# Altium PCB pcb.PcbDoc
Units mm, origin at the board's own origin, x right, y up, seen from the top; angles counter-clockwise.
Board outline 26 x 23 mm, 2 copper layers (Top Layer, Bottom Layer), stack 1.58 mm thick; 25 components, 19 nets, 112 pads, 26 vias.
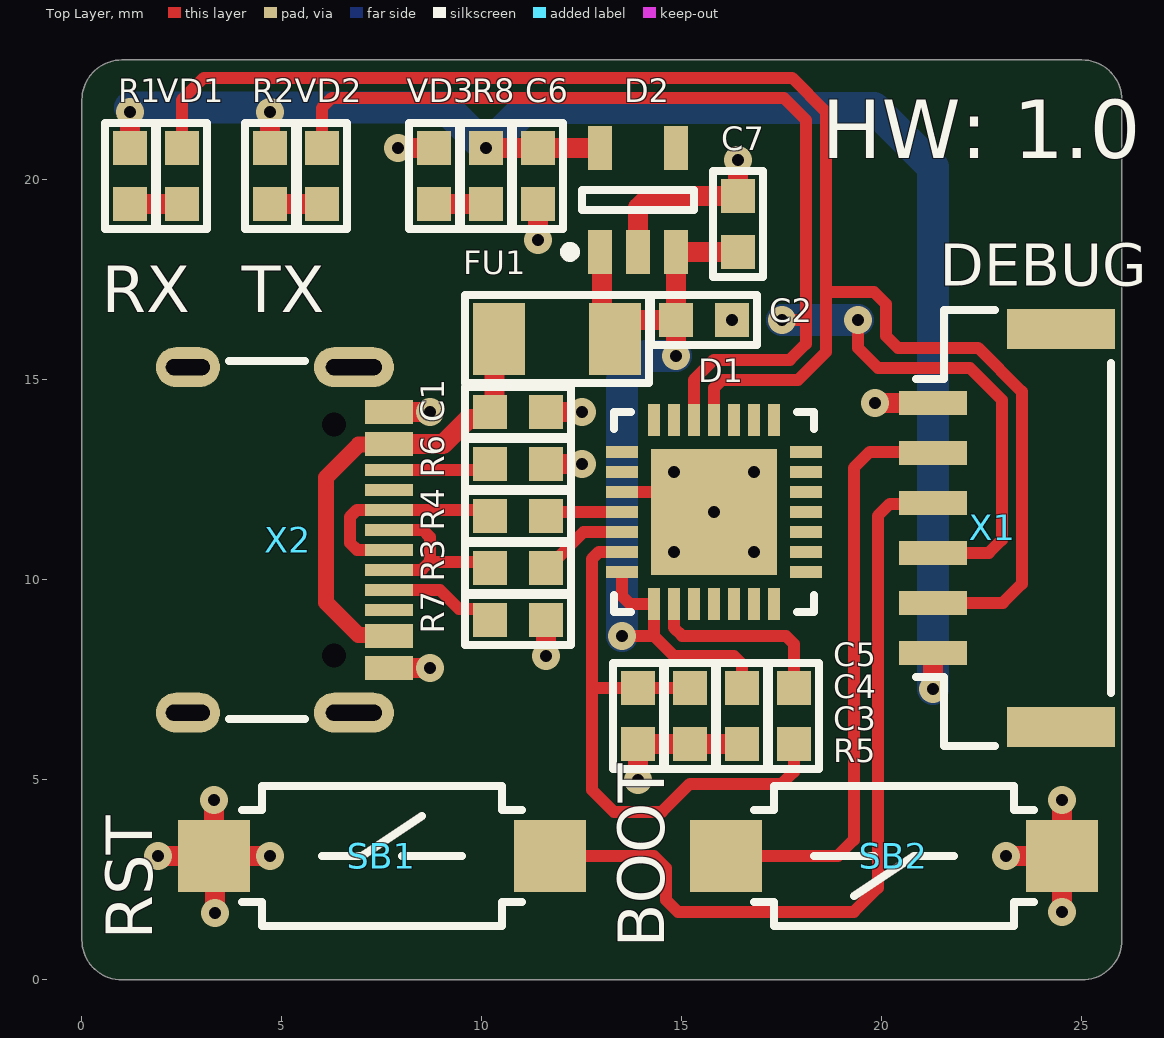
[diagram p0: Top Layer view]
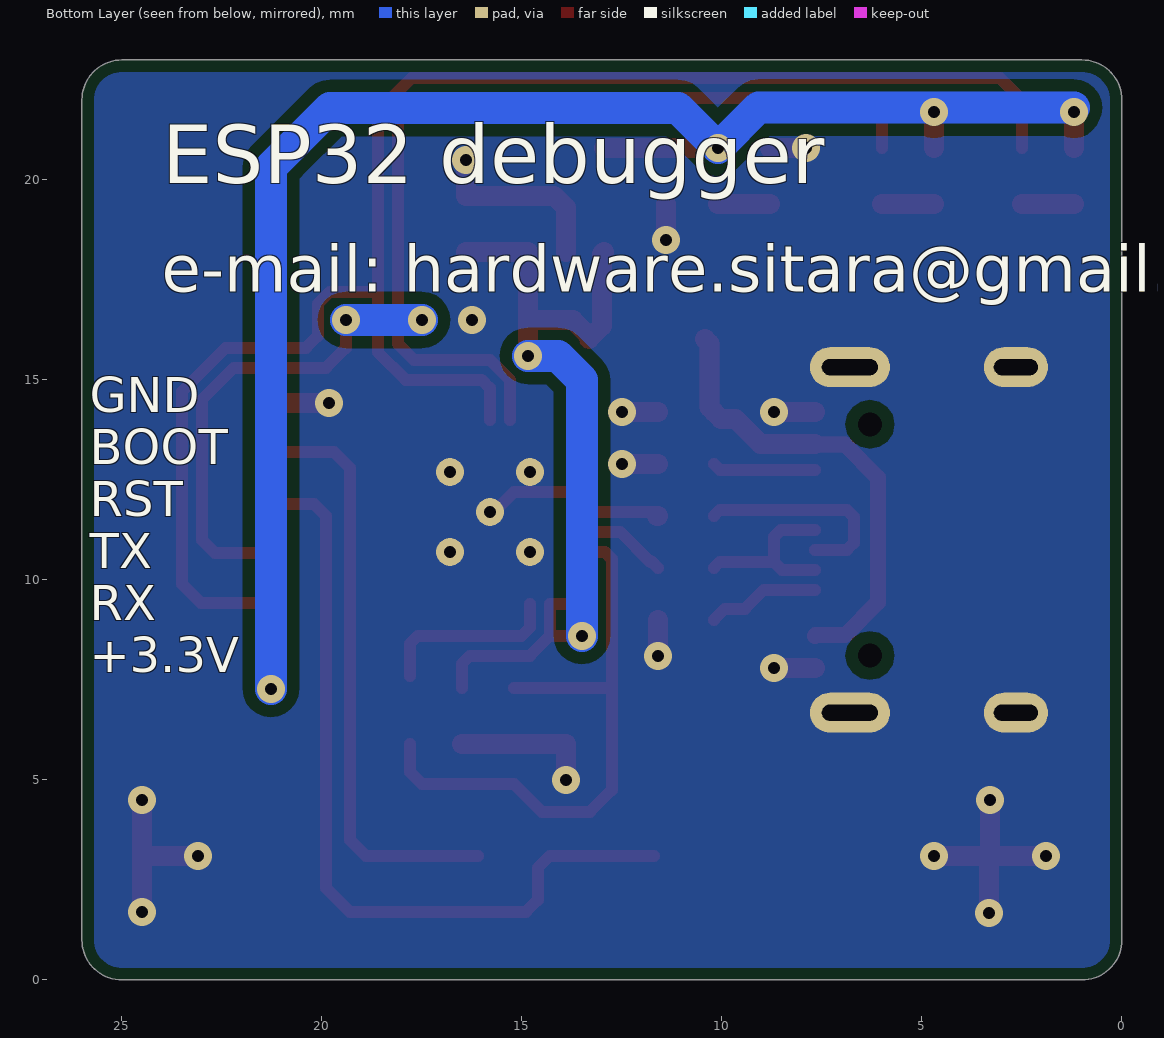
[diagram p1: Bottom Layer view, seen from below]
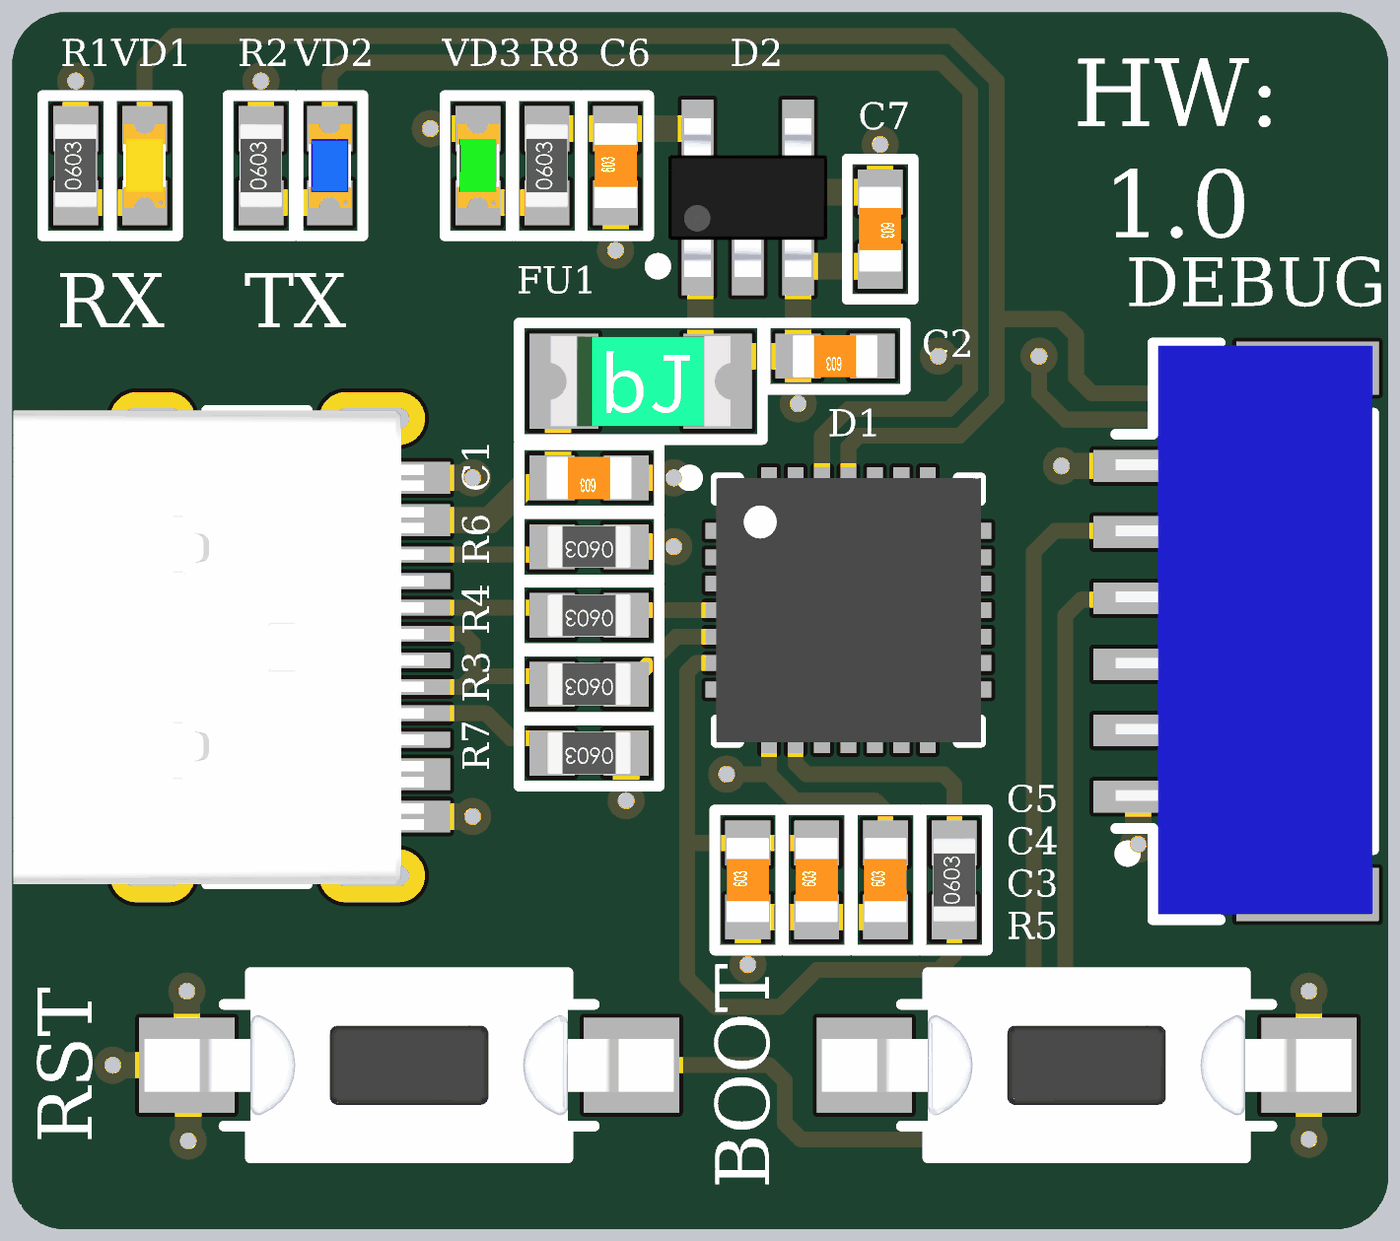
[diagram p2: 3D render of the assembled board from above, using the file's embedded part models]

## Layer stack, top to bottom
Top Solder: solder mask 0.0102, Solder Resist, Dk 3.5
Top Layer: signal copper 0.0356
Dielectric 1: dielectric 1.509, FR-4, Dk 4.8
Bottom Layer: signal copper 0.0356
Bottom Solder: solder mask 0.0102, Solder Resist, Dk 3.5

## Board outline
1,0 cw(c1,1) 0,1 0,22 cw(c1,22) 1,23 25,23 cw(c25,22) 26,22 26,1 cw(c25,1) 25,0

## Design rules (kind name [scope] priority, off if disabled: settings)
BoardOutlineClearance [All] p1: gap=0.3 ignorepadtopadclearanceinfootprint=FALSE
Clearance Clearance_MultiLayerPad [OnLayer('Multi-Layer') and IsPad] p1: gap=0.3 ignorepadtopadclearanceinfootprint=FALSE except(0: Arc-Hole Track-Hole SMDPad-Hole THPad-Hole Via-Hole Fill-Hole Poly-Hole Region-Hole Text-Hole)
Clearance Clearance_Polygon [InPolygon] p2: gap=0.2 ignorepadtopadclearanceinfootprint=FALSE except(0: Arc-Hole Track-Hole SMDPad-Hole THPad-Hole Via-Hole Fill-Hole Poly-Hole Region-Hole Text-Hole; 0.3: Arc-Poly Arc-Region Track-Poly Track-Region SMDPad-Poly SMDPad-Region THPad-Poly THPad-Region Via-Poly Via-Region Fill-Poly Fill-Region Poly-Poly Poly-Region Region-Region)
Clearance [All] p3: gap=0.2 ignorepadtopadclearanceinfootprint=FALSE except(0: Arc-Hole Track-Hole SMDPad-Hole THPad-Hole Via-Hole Fill-Hole Poly-Hole Region-Hole Text-Hole)
ComponentClearance [All] p1: gap=0.2 collisioncheckmode=3 verticalgap=0.2 showdistances=FALSE
DiffPairsRouting [All] p1: maxlimit=0.4 minlimit=0.2 mostfreqgap=0.2 toplayer_minwidth=0.2 toplayer_maxwidth=0.3 toplayer_prefwidth=0.2 bottomlayer_minwidth=0.2 bottomlayer_maxwidth=0.3 bottomlayer_prefwidth=0.2 maxuncoupledlength=12.7
Height [All] p1: minheight=0 maxheight=50 prefheight=12.7
HoleSize [All] p1: absolutevalues=TRUE maxlimit=10 minlimit=0.2 maxpercent=80.000 minpercent=20.000
HoleToHoleClearance [All] p1: gap=0.3 allowstackedmicrovias=TRUE
MinimumSolderMaskSliver [All] p1: minsoldermaskwidth=0.05
PlaneClearance [All] p1: clearance=0.5
PlaneConnect [All] p1: planeconnectstyle=Relief reliefexpansion=0.5 reliefentries=4 reliefconductorwidth=0.5 reliefairgap=0.3
PolygonConnect PolygonConnect_PadGND [InNet('GND') and IsPad] p1: connectstyle=Direct reliefconductorwidth=0.5 reliefentries=4 polygonreliefangle="90 Angle" airgapwidth=0.3
PolygonConnect PolygonConnect_Via [IsVia] p2: connectstyle=Direct reliefconductorwidth=0.254 reliefentries=4 polygonreliefangle="90 Angle" airgapwidth=0.254
PolygonConnect [All] p3: connectstyle=Relief reliefconductorwidth=0.5 reliefentries=4 polygonreliefangle="90 Angle" airgapwidth=0.3
RoutingTopology [All] p1: topology=Vertical
RoutingVias [All] p1: holewidth=0.2 width=0.4 viastyle="Through Hole" minholewidth=0.2 minwidth=0.4 maxholewidth=0.5 maxwidth=1.2
SilkToSilkClearance [All] p1: silktosilkclearance=0.05
SilkToSolderMaskClearance [IsPad] p1: minsilkscreentomaskgap=0.05 clearancetoexposedcopper=TRUE
SolderMaskExpansion [All] p1: expansion=0.075 istentingtop=FALSE
Width [All] p1: maxlimit=10 minlimit=0.2 preferedwidth=0.2
19 further rules are at their usual default settings.

## Components (designator, comment, footprint, x,y, rotation, side; value= is the part's Value field where it differs from the comment)
C1 "Ceramic capacitor, 4.7μF, X7R, ±10%, 6.3V, 603, -55...+125°C" "CAP: 0603" 10.9,14.2 r180 top value=4.7μF
C2 "Ceramic capacitor, 4.7μF, X7R, ±10%, 6.3V, 603, -55...+125°C" "CAP: 0603" 15.55,16.5 r180 top value=4.7μF
C3 "Ceramic capacitor, 0.1μF, X7R, ±10%, 50V, 603, -55...+125°C" "CAP: 0603" 16.5,6.6 r90 top value=0.1μF
C4 "Ceramic capacitor, 4.7μF, X7R, ±10%, 6.3V, 603, -55...+125°C" "CAP: 0603" 15.2,6.6 r90 top value=4.7μF
C5 "Ceramic capacitor, 0.1μF, X7R, ±10%, 50V, 603, -55...+125°C" "CAP: 0603" 13.9,6.6 r90 top value=0.1μF
C6 "Ceramic capacitor, 0.1μF, X7R, ±10%, 50V, 603, -55...+125°C" "CAP: 0603" 11.4,20.1 r90 top value=0.1μF
C7 "Ceramic capacitor, 0.1μF, X7R, ±10%, 50V, 603, -55...+125°C" "CAP: 0603" 16.4,18.9 r270 top value=0.1μF
D1 "IC usb-to-uart bridge, USB2.0, 3...3.6V, -40...+85°C, 28-VFQFN" "28-QFN (5x5)" 15.8,11.7 r0 top
D2 "Linear voltage regulator, input 4...24V, 0.5V, output 3.3V, 0.15A, -40...+85°C, SOT23-6" SOT23-5 13.9,19.5 r90 top
FU1 "='='Electromechanics relay'+', '+'32VDC'+', '+'3A'+', '+'1206 case'+', '+Temperature'" "FUSE: 1206" 11.875,16.025 r0 top
R1 "Resistor film, 1k, ±1%, 603, 0.1W, -55...+125°C" "RES: 0603" 1.2,20.1 r90 top value=1k
R2 "Resistor film, 1k, ±1%, 603, 0.1W, -55...+125°C" "RES: 0603" 4.7,20.1 r90 top value=1k
R3 "Resistor film, 22R, ±1%, 603, 0.1W, -55...+125°C" "RES: 0603" 10.9,10.3 r180 top value=22R
R4 "Resistor film, 22R, ±1%, 603, 0.1W, -55...+125°C" "RES: 0603" 10.9,11.6 r180 top value=22R
R5 "Resistor film, 1k, ±1%, 603, 0.1W, -55...+125°C" "RES: 0603" 17.8,6.6 r90 top value=1k
R6 "Resistor film, 5k1, ±1%, 603, 0.1W, -55...+125°C" "RES: 0603" 10.9,12.9 r180 top value=5k1
R7 "Resistor film, 5k1, ±1%, 603, 0.1W, -55...+125°C" "RES: 0603" 10.9,9 r180 top value=5k1
R8 "Resistor film, 1k, ±1%, 603, 0.1W, -55...+125°C" "RES: 0603" 10.1,20.1 r90 top value=1k
SB1 "Tactile button, 6x6mm" "BUT: 6x3.5 SMD" 7.5,3.1 r0 top
SB2 "Tactile button, 6x3.5mm" "BUT: 6x3.5 SMD" 20.3,3.1 r180 top
VD1 "LED, 20mA, 2V, 603, -55...+150°C" "LED: 0603Y" 2.5,20.1 r90 top
VD2 "LED, 20mA, 3.2V, 603, -55...+150°C" "LED: 0603B" 6,20.1 r90 top
VD3 "LED, 20mA, 2V, 603, -55...+150°C" "LED: 0603G" 8.8,20.1 r90 top
X1 "Connector, 6pin, 1.25mm, 50VDC, 1A" "CON: SM06B-GHS" 25.7,11.3 r90 top
X2 "USB Type C, 3A" "CON: TYPE-C-31-M-12" 6.3,11 r90 top

## Footprints (in the part's own frame and the unit in brackets; to place one, negate y for a bottom-side part, rotate by r counter-clockwise, add the part's x,y. Pads: shape width x height; smd on the part's side, far side on the other; paste and mask are expansions set on the pad)
"28-QFN (5x5)" [mm] "5x5 mm, pitch 0.5 mm, power pad"
  round 0.7 hole 0.3 mask+0.075: 0(-1,-1) 0(-1,1) 0(0,0) 0(1,-1) 0(1,1)
  rect 3.15x3.15 smd: 0(0,0)
  rect 0.8x0.3 smd: 1(-2.3,1.5) 2(-2.3,1) 3(-2.3,0.5) 4(-2.3,0) 5(-2.3,-0.5) 6(-2.3,-1) 7(-2.3,-1.5) 15(2.3,-1.5) 16(2.3,-1) 17(2.3,-0.5) 18(2.3,0) 19(2.3,0.5) 20(2.3,1) 21(2.3,1.5)
  rect 0.3x0.8 smd: 8(-1.5,-2.3) 9(-1,-2.3) 10(-0.5,-2.3) 11(0,-2.3) 12(0.5,-2.3) 13(1,-2.3) 14(1.5,-2.3) 22(1.5,2.3) 23(1,2.3) 24(0.5,2.3) 25(0,2.3) 26(-0.5,2.3) 27(-1,2.3) 28(-1.5,2.3)
  round 0.5 on Top Overlay: ""(-3,2.5)
  round 0.5 on Mech1: ""(-2,2)
  silkscreen extent -2.5,-2.5 2.5,2.5, body extent -2.5,-2.5 2.5,2.5, height 0.9
"BUT: 6x3.5 SMD" [mm]
  rect 1.8x1.8 smd mask+0.075: 1(-4.2,0) 2(4.2,0)
  silkscreen extent -3.5,-1.75 3.5,1.75, body extent -5,-1.75 5,1.75, height 5.05
"CAP: 0603" [mm]
  rect 0.85x0.85 smd: 1(-0.7,0) 2(0.7,0)
  silkscreen extent -1.33,-0.63 1.33,0.63, body extent -0.8,-0.4 0.8,0.4, height 0.3
"CON: SM06B-GHS" [mm]
  rect 1x2.7 smd: 0(-4.975,1.225) 0(4.975,1.225)
  rect 0.6x1.7 smd: 1(-3.125,4.425) 2(-1.875,4.425) 3(-0.625,4.425) 4(0.625,4.425) 5(1.875,4.425) 6(3.125,4.425)
  round 0.5 on Mech1: ""(-4.9,4.425)
  round 0.5 on Top Overlay: ""(-4.2,4.625)
  silkscreen extent -5.45,-0.03 5.45,4.85, body extent -5.35,0 5.4,4.85, height 4.33
"CON: TYPE-C-31-M-12" [mm]
  rect 0.6x1.2 smd mask+0.075: A1(-3.2,-1.375) A4(-2.4,-1.375) B1(3.2,-1.375) B4(2.4,-1.375)
  rect 0.3x1.2 smd mask+0.075: A5(-1.25,-1.375) A6(-0.25,-1.375) A7(0.25,-1.375) A8(1.25,-1.375) B5(1.75,-1.375) B6(0.75,-1.375) B7(-0.75,-1.375) B8(-1.75,-1.375)
  oval 1x2 hole 0.4 slot 1.4 at 90 deg mask+0.075: MH(-4.32,-0.5) MH(4.32,-0.5)
  oval 1x1.6 hole 0.4 slot 1.1 at 90 deg mask+0.075: MH(-4.32,3.65) MH(4.32,3.65)
  round 0 hole 0.6 mask+0.075: MH(-2.89,0) MH(2.89,0)
  silkscreen extent -4.47,0.72 4.47,2.63, body extent -4.48,-1.48 4.48,6.28, height 3.26
"FUSE: 1206" [mm]
  rect 1.3x1.8 smd: 1(-1.45,0) 2(1.45,0)
  silkscreen extent -2.3,-1.1 2.3,1.1, body extent -1.7,-0.85 1.7,0.85, height 0.51
"LED: 0603B" [mm]
  rect 0.85x0.85 smd: 1(-0.7,0) 2(0.7,0)
  silkscreen extent -1.33,-0.63 1.33,0.6, body extent -0.8,-0.4 0.8,0.4, height 0.6
"LED: 0603G" [mm]
  rect 0.85x0.85 smd: 1(-0.7,0) 2(0.7,0)
  silkscreen extent -1.33,-0.63 1.33,0.63, body extent -0.8,-0.4 0.8,0.4, height 0.6
"LED: 0603Y" [mm]
  rect 0.85x0.85 smd: 1(-0.7,0) 2(0.7,0)
  silkscreen extent -1.33,-0.63 1.33,0.63, body extent -0.8,-0.4 0.8,0.4, height 0.6
"RES: 0603" [mm]
  rect 0.85x0.85 smd: 1(-0.7,0) 2(0.7,0)
  silkscreen extent -1.33,-0.63 1.33,0.63, body extent -0.8,-0.4 0.8,0.4, height 0.44
SOT23-5 [mm] "pitch 0.95 mm"
  rect 1.1x0.6 smd: 1(-1.3,0.95) 2(-1.3,0) 3(-1.3,-0.95) 4(1.3,-0.95) 5(1.3,0.95)
  round 0.5 on Mech1: ""(-1.1,1.1)
  silkscreen extent -1.42,-1.4 0.25,1.82, body extent -1.5,-1.5 1.5,1.5, height 1.3

## Part data
C1 C2 C4: library part Ceramic_0603, Manufacturer=Samsung, Package=0603, PartNumber=CL10B475KQ8NQNC, Temperature=-55...+125°C, Tolerance=±10%, TypeCapacitor="Ceramic capacitor", TypeDielectric=X7R, Voltage=6.3V, HelpURL=https://www.digikey.com/product-detail/en/samsung-electro-mechanics/CL10B475KQ8NQNC/1276-2087-6-ND/3892601, ValueManufacturerPartNumber="Ceramic capacitor, 4.7μF, X7R, ±10%, 6.3V, 603, -55...+125°C"
C3 C5 C6 C7: library part Ceramic_0603, Manufacturer=Samsung, Package=0603, PartNumber=CL10B104KB8NNNL, Temperature=-55...+125°C, Tolerance=±10%, TypeCapacitor="Ceramic capacitor", TypeDielectric=X7R, Voltage=50V, HelpURL=https://www.digikey.com/product-detail/en/samsung-electro-mechanics/CL10B104KB8NNNL/1276-CL10B104KB8NNNLCT-ND/10320686, ValueManufacturerPartNumber="Ceramic capacitor, 0.1μF, X7R, ±10%, 50V, 603, -55...+125°C"
D1: library part CP2102N, "USB-to-UART", Manufacturer="Silicon Labs", Package=28-VFQFN, PartNumber=CP2102N-A02-GQFN28, Temperature=-40...+85°C, ComponentType="IC usb-to-uart bridge", HelpURL=https://www.digikey.com/product-detail/en/silicon-labs/CP2102N-A02-GQFN28/336-5889-ND/9863477, Standard=USB2.0, Supply=3...3.6V, ValueManufacturerPartNumber="IC usb-to-uart bridge, USB2.0, 3...3.6V, -40...+85°C, 28-VFQFN"
D2: library part AP2204K-3.3TRG1, "Linear voltage regulator", CurrentOutput=0.15A, Manufacturer="Diodes Incorporated", Package=SOT23-6, Temperature=-40...+85°C, VoltageInput="input 4...24V", VoltageOutput="output 3.3V", ComponentType="Linear voltage regulator", HelpURL=https://www.digikey.com/product-detail/en/diodes-incorporated/AP2204K-3.3TRG1/AP2204K-3.3TRG1DICT-ND/4505288, MaxDropout=0.5V, PartNumber=AP2204K-3.3TRG1, ValueManufacturerPartNumber="Linear voltage regulator, input 4...24V, 0.5V, output 3.3V, 0.15A, -40...+85°C, SOT23-6"
FU1: library part Fuse, Manufacturer=Panasonic, MaxCurrent=3A, Package="1206 case", PartNumber=ERB-RG3R00V, ValueManufacturerPartNumber="='Electromechanics relay'+', '+'32VDC'+', '+'3A'+', '+'1206 case'+', '+Temperature", VoltageMax=32VDC, HelpURL=https://www.digikey.com/product-detail/en/panasonic-electronic-components/ERB-RG3R00V/P16741CT-ND/4280098, TypeFuse="Electromechanics relay"
R1 R2 R5 R8: library part Resistor_0603, Manufacturer=Yageo, Package=0603, PartNumber=RC0603FR-071KL, Power=0.1W, Temperature=-55...+125°C, Tolerance=±1%, TypeResistor="Resistor film", HelpURL=https://www.digikey.com/product-detail/en/yageo/RC0603FR-071KL/311-1-00KHRCT-ND/729790, ValueManufacturerPartNumber="Resistor film, 1k, ±1%, 603, 0.1W, -55...+125°C"
R3 R4: library part Resistor_0603, Manufacturer=Yageo, Package=0603, PartNumber=RC0603FR-0722RL, Power=0.1W, Temperature=-55...+125°C, Tolerance=±1%, TypeResistor="Resistor film", HelpURL=https://www.digikey.com/product-detail/en/yageo/RC0603FR-0722RL/311-22-0HRCT-ND/730002, ValueManufacturerPartNumber="Resistor film, 22R, ±1%, 603, 0.1W, -55...+125°C"
R6 R7: library part Resistor_0603, Manufacturer=Yageo, Package=0603, PartNumber=RC0603FR-075K1L, Power=0.1W, Temperature=-55...+125°C, Tolerance=±1%, TypeResistor="Resistor film", HelpURL=https://www.digikey.com/product-detail/en/yageo/RC0603FR-075K1L/311-5-10KHRCT-ND/730215, ValueManufacturerPartNumber="Resistor film, 5k1, ±1%, 603, 0.1W, -55...+125°C"
SB1: library part Button_tactile, Manufacturer="TE Connectivity", Package=6x6mm, PartNumber=FSM2JSMAATR, CommentText="\"RESET\"", HelpURL=https://www.digikey.com/product-detail/en/te-connectivity-alcoswitch-switches/FSM2JSMAATR/450-1792-1-ND/3503931, TypeButton="Tactile button", ValueManufacturerPartNumber="Tactile button, 6x6mm"
SB2: library part Button_tactile, Manufacturer="TE Connectivity", Package=6x3.5mm, PartNumber=FSM2JSMAATR, CommentText="\"BOOT\"", HelpURL=https://www.digikey.com/product-detail/en/te-connectivity-alcoswitch-switches/FSM2JSMAATR/450-1792-1-ND/3503931, TypeButton="Tactile button", ValueManufacturerPartNumber="Tactile button, 6x3.5mm"
VD1: library part LED_single, Color=YELLOW, Current=20mA, Manufacturer=Wurth, Package=0603, PartNumber=150060YS75000, Temperature=-55...+150°C, VoltageDrop=2V, HelpURL=https://www.digikey.com/product-detail/en/wurth-electronics-inc/150060YS75000/732-4981-1-ND/4489907, TypeDiode=LED, ValueManufacturerPartNumber="LED, 20mA, 2V, 603, -55...+150°C"
VD2: library part LED_single, Color=BLUE, Current=20mA, Manufacturer=Wurth, Package=0603, PartNumber=150060BS75000, Temperature=-55...+150°C, VoltageDrop=3.2V, HelpURL=https://www.digikey.com/product-detail/en/wurth-electronics-inc/150060BS75000/732-4966-1-ND/4489893, TypeDiode=LED, ValueManufacturerPartNumber="LED, 20mA, 3.2V, 603, -55...+150°C"
VD3: library part LED_single, Color=GREEN, Current=20mA, Manufacturer=Wurth, Package=0603, PartNumber=150060VS75000, Temperature=-55...+150°C, VoltageDrop=2V, HelpURL=https://www.digikey.com/product-detail/en/w-rth-elektronik/150060VS75000/732-4980-1-ND/4489904, TypeDiode=LED, ValueManufacturerPartNumber="LED, 20mA, 2V, 603, -55...+150°C"
X1: library part Connector_SM06B, CurrentMax=1A, Manufacturer=JST, PartNumber=SM06B-GHS, VoltageMax=50VDC, CommentText="\"Debug ESP32\"", HelpURL=https://www.digikey.com/product-detail/en/jst-sales-america-inc/SM06B-GHS-TB-LF-SN/455-1568-1-ND/807836, Multichannel=6pin, Pitch=1.25mm, TypeConnector=Connector, ValueManufacturerPartNumber="Connector, 6pin, 1.25mm, 50VDC, 1A"
X2: library part Connector_USB_Type_C, CurrentMax=3A, Manufacturer="Korean Hroparts", PartNumber=TYPE-C-31-M-12, CommentText="\"USB Type C\"", HelpURL=https://lcsc.com/product-detail/USB-Type-C_Korean-Hroparts-Elec-TYPE-C-31-M-12_C165948.html, TypeConnector="USB Type C", ValueManufacturerPartNumber="USB Type C, 3A"

## Via types
v1: diameter 0.7, hole 0.3, Top Layer to Bottom Layer, tented both sides, 26 vias

## Nets (pads, with @x,y where several pads share a name; then routed paths per layer and width w, separated by ;. In a path a pad name is that pad's centre, name@x,y a point inside that pad or via, vN(x,y) a via of type N, cw(c..) or ccw(c..) an arc to the next point about the centre after c; other vN are vias at no path point)
+3.3V: C6.2 D2.5 R1.2 R2.2 R8.2 X1.1 | length 40.1
  Top Layer w0.5: R1.2 v1(1.2,21.7) ; R2.2 v1(4.7,21.7) ; v1(10.1,20.8) C6.2 D2.5 ; v1(21.275,7.275) X1.1
  Bottom Layer w0.8: v1@1.2,21.809 9.091,21.809 v1(10.1,20.8) 11.1,21.8 19.8,21.8 20.9,20.7 21.275,20.325 v1(21.275,7.275)
+5V-BUS: C2.2 C3.2 C7.2 D1.7 D1.8 D2.1 D2.3 FU1.2 | length 22.4
  Top Layer w0.3: v1(13.5,8.6) 14.3,8.6 ; D1.7 13.5,9.6 13.7,9.4 D1.8 14.3,8.6 ; C3.2 16.5,7.9 16.3,8.1 14.8,8.1 14.3,8.6
  Top Layer w0.5: D2.1 13,18.15 13,16.35 FU1.2 13.325,16.1 13.725,16.5 C2.2 ; v1(14.85,15.6) C2.2 ; C7.2 D2.3 C2.2
  Bottom Layer w0.8: v1(13.5,8.6) 13.5,15 14.1,15.6 v1(14.85,15.6)
GND: C1.1 C2.1 C3.1 C4.1 C5.1 C6.1 C7.1 D1.0 D1.3 D2.2 R6.1 R7.1 SB1.1 SB2.1 VD3.2 X1.6 X2.A1 X2.B1 X2.MH@2.65,6.68 X2.MH@2.65,15.32 X2.MH@6.8,6.68 X2.MH@6.8,15.32 | length 28.4
  Top Layer w0.3: D1.3 15.192,12.2 15.692,11.7 D1.0@15.8,11.7
  Top Layer w0.5: v1(1.9,3.1) SB1.1 ; v1(3.3,4.5) SB1.1 ; v1(3.326,1.667) SB1.1@3.326,3.067 ; v1(4.7,3.1) SB1.1 ; X2.A1 v1(8.7,7.8) ; X2.B1 v1(8.7,14.2) ; v1(7.9,20.8) VD3.2 ; v1(11.4,18.5) C6.1 ; v1(11.6,8.1) R7.1 ; R6.1 v1(12.5,12.9) ; C1.1 v1(12.5,14.2) ; v1(13.9,5) C5.1 C4.1 C3.1 ; D2.2 13.9,19.307 14.193,19.6 C7.1 v1(16.4,20.5) ; v1(19.825,14.425) X1.6 ; v1(23.1,3.1) SB2.1 ; v1(24.5,1.7) SB2.1 ; v1(24.5,4.5) SB2.1
  other v1: 16.25,16.5
NetC1_2: C1.2 FU1.1 X2.A4 X2.B4 | length 11.7
  Top Layer w0.4: X2.A4 7.654,8.621 6.921,8.621 6.1,9.441 6.1,12.559 6.921,13.379 7.654,13.379 X2.B4
  Top Layer w0.5: X2.B4 9.031,13.4 9.656,14.025 10.025,14.025 C1.2 10.313,14.313 10.313,15.913 FU1.1
NetC4_2: C4.2 C5.2 D1.6 R5.1 | length 15.4
  Top Layer w0.3: 12.8,7.3 C4.2 ; D1.6 12.926,10.7 12.75,10.524 12.75,7.476 12.75,4.75 13.3,4.2 14.5,4.2 15.2,4.9 17.5,4.9 17.8,5.2 R5.1
NetD1_4: D1.4 R4.1 | length 2
  Top Layer w0.3: R4.1 11.7,11.7 D1.4
  Top Layer w0.5: R4.1 R4.1@11.622,11.6
NetD1_5: D1.5 R3.1 | length 2.3
  Top Layer w0.3: R3.1 11.761,10.461 11.806,10.461 12.545,11.2 D1.5
NetD1_9: D1.9 R5.2 | length 4.6
  Top Layer w0.3: D1.9 14.8,8.807 15.007,8.6 17.6,8.6 17.8,8.4 R5.2@17.8,7.6
NetD1_25: D1.25 VD1.2 X1.2 | length 41.5
  Top Layer w0.3: VD1.2 2.5,22 3.05,22.55 17.757,22.55 18.6,21.707 18.6,17.2 ; D1.25 15.8,14.793 16.007,15 17.907,15 18.6,15.693 18.6,17.2 ; X1.2 23.025,9.425 23.5,9.9 23.5,14.707 22.407,15.8 20.4,15.8 20.1,16.1 20.1,16.9 19.8,17.2 18.6,17.2
NetD1_26: D1.26 VD2.2 X1.3 | length 35.9
  Top Layer w0.3: VD2.2 6,21.8 6.25,22.05 17.55,22.05 18.1,21.5 18.1,15.9 17.7,15.5 15.8,15.5 15.3,15 D1.26 ; v1(17.5,16.5) 18.1,16.5 ; v1(19.4,16.5) 19.4,15.8 19.9,15.3 22.2,15.3 23,14.5 23,11 22.675,10.675 X1.3
  Bottom Layer w0.8: v1(17.5,16.5) v1(19.4,16.5)
NetR1_1: R1.1 VD1.1 | length 1.3
  Top Layer w0.5: R1.1 VD1.1
NetR2_1: R2.1 VD2.1 | length 1.3
  Top Layer w0.5: R2.1 VD2.1
NetR3_2: R3.2 X2.A7 X2.B7 | length 4.4
  Top Layer w0.3: X2.B7 8.5,10.25 8.7,10.45 ; X2.A7 8.524,11.25 8.7,11.074 8.7,10.45 ; R3.2 10.05,10.45 8.7,10.45
NetR4_2: R4.2 X2.A6 X2.B6 | length 5.3
  Top Layer w0.3: X2.A6 6.876,10.75 6.7,10.926 6.7,11.574 6.876,11.75 X2.B6 10.05,11.75 R4.2
NetR6_2: R6.2 X2.B5 | length 2.6
  Top Layer w0.3: X2.B5 10.05,12.75 R6.2
NetR7_2: R7.2 X2.A5 | length 2.8
  Top Layer w0.3: X2.A5 8.95,9.75 9.425,9.275 9.925,9.275 R7.2
NetR8_1: R8.1 VD3.1 | length 1.3
  Top Layer w0.5: VD3.1 R8.1
NetSB1_2: SB1.2 X1.4 | length 20.3
  Top Layer w0.3: SB1.2 14.3,3.1 14.6,2.8 14.6,2 14.9,1.7 19.3,1.7 19.9,2.3 19.9,11.6 20.2,11.9 21.25,11.9 X1.4
NetSB2_2: SB2.2 X1.5 | length 14.8
  Top Layer w0.3: SB2.2 18.9,3.1 19.3,3.5 19.3,12.8 19.7,13.2 21.25,13.2 X1.5
pads on no net: D1. D1.1 D1.2 D1.10 D1.11 D1.12 D1.13 D1.14 D1.15 D1.16 D1.17 D1.18 D1.19 D1.20 D1.21 D1.22 D1.23 D1.24 D1.27 D1.28 D2. D2.4 X1. X1.0 X2.A8 X2.B8 X2.MH@6.3,8.11 X2.MH@6.3,13.89

## Polygon pours and split planes (outlines as drawn)
GND on Bottom Layer "GND" (solid, pour order 0): 0,0 0,23 26,23 26,0

## Silkscreen, mask and mechanical layers (free items; w line width, h text height)
Top Overlay:
  text "HW: 1.0" at 18.5,20.05 h2.5
  text "DEBUG" at 21.448,17 h1.8
  text "RX" at 0.5,16.3 h2
  text "TX" at 4,16.3 h2
  text "RST" at 2.15,1 h2 r90
  text "BOOT" at 14.95,0.8 h2 r90
Bottom Overlay:
  text "ESP32 debugger" at 23.987,19.435 h2.5
  text "e-mail: hardware.sitara@gmail.com" at 24,16.817 h2
  text "GND" at 25.8,13.9 h1.5
  text "BOOT" at 25.8,12.6 h1.5
  text "RST" at 25.8,11.3 h1.5
  text "TX" at 25.8,10 h1.5
  text "RX" at 25.8,8.7 h1.5
  text "+3.3V" at 25.8,7.4 h1.5
Border:
  the board outline again, w0.2

## Dimensions
0,0 to 0,23 on Size
0,23 to 26,23 on Size